# EAGLE board SparkFun_Pulse_Oximeter_Heart-Rate_Sensor-Panel (EAGLE 9.6.2), part 1 of 4
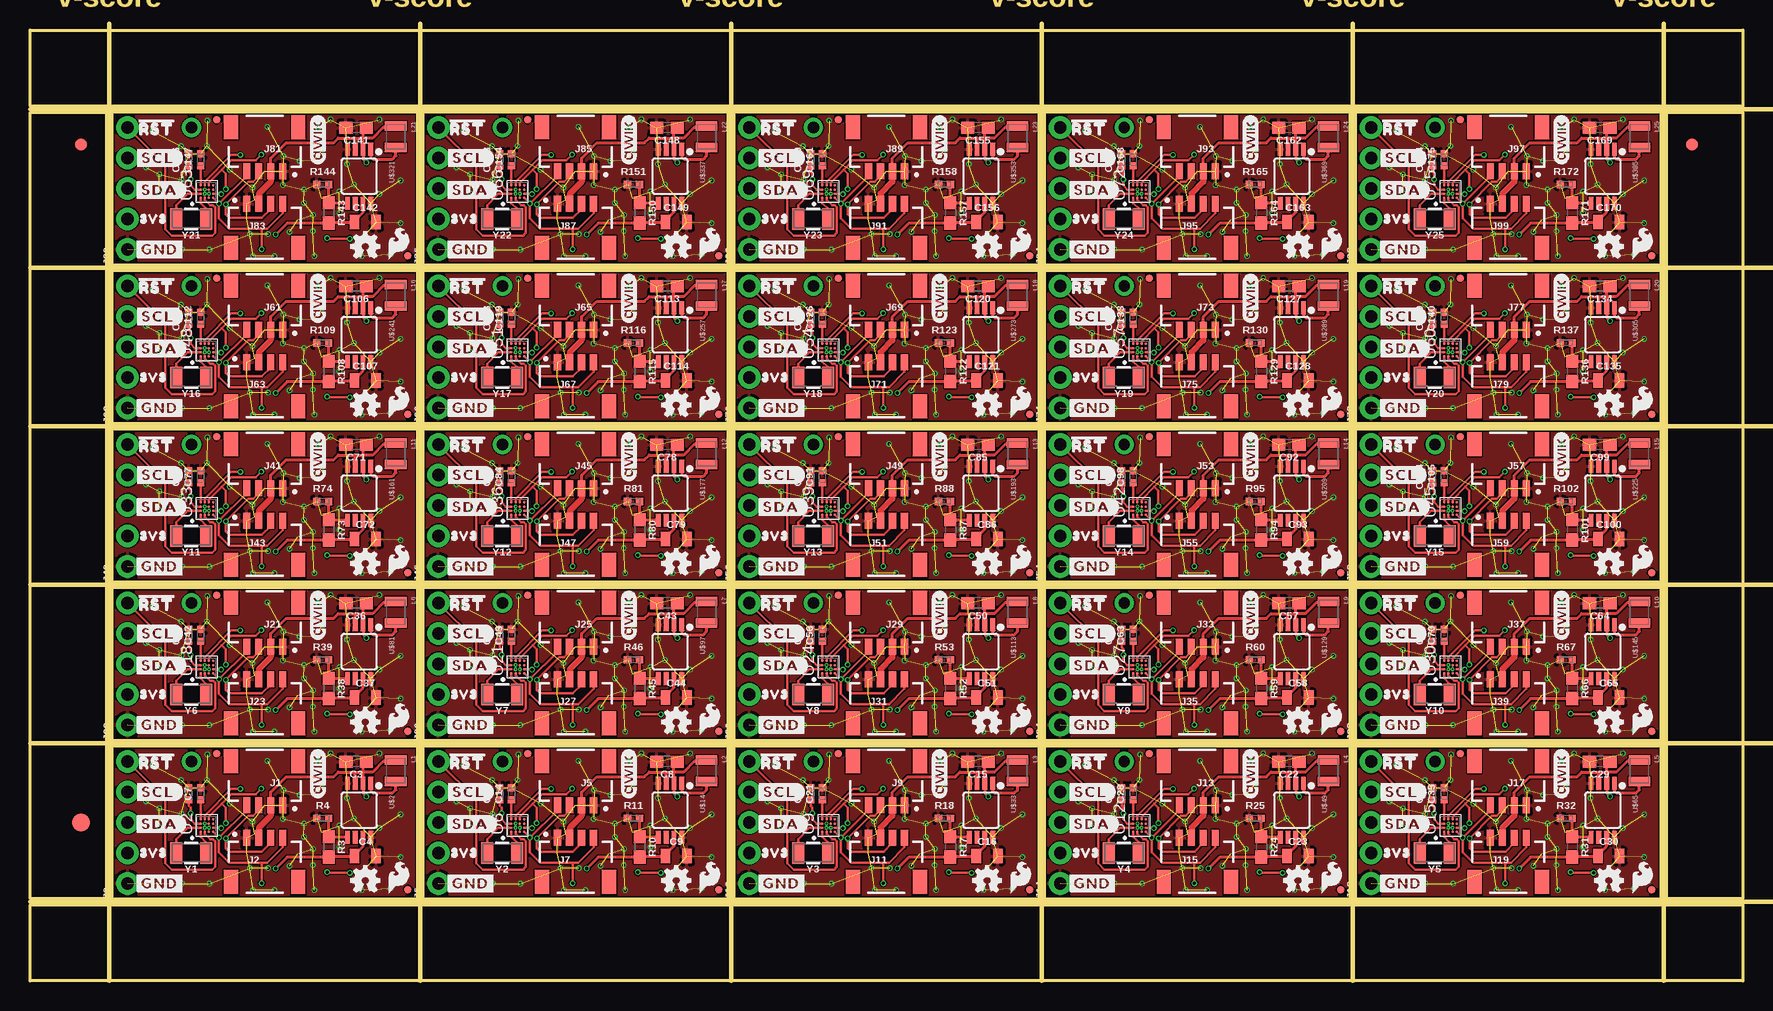
[diagram p0: board, top side]
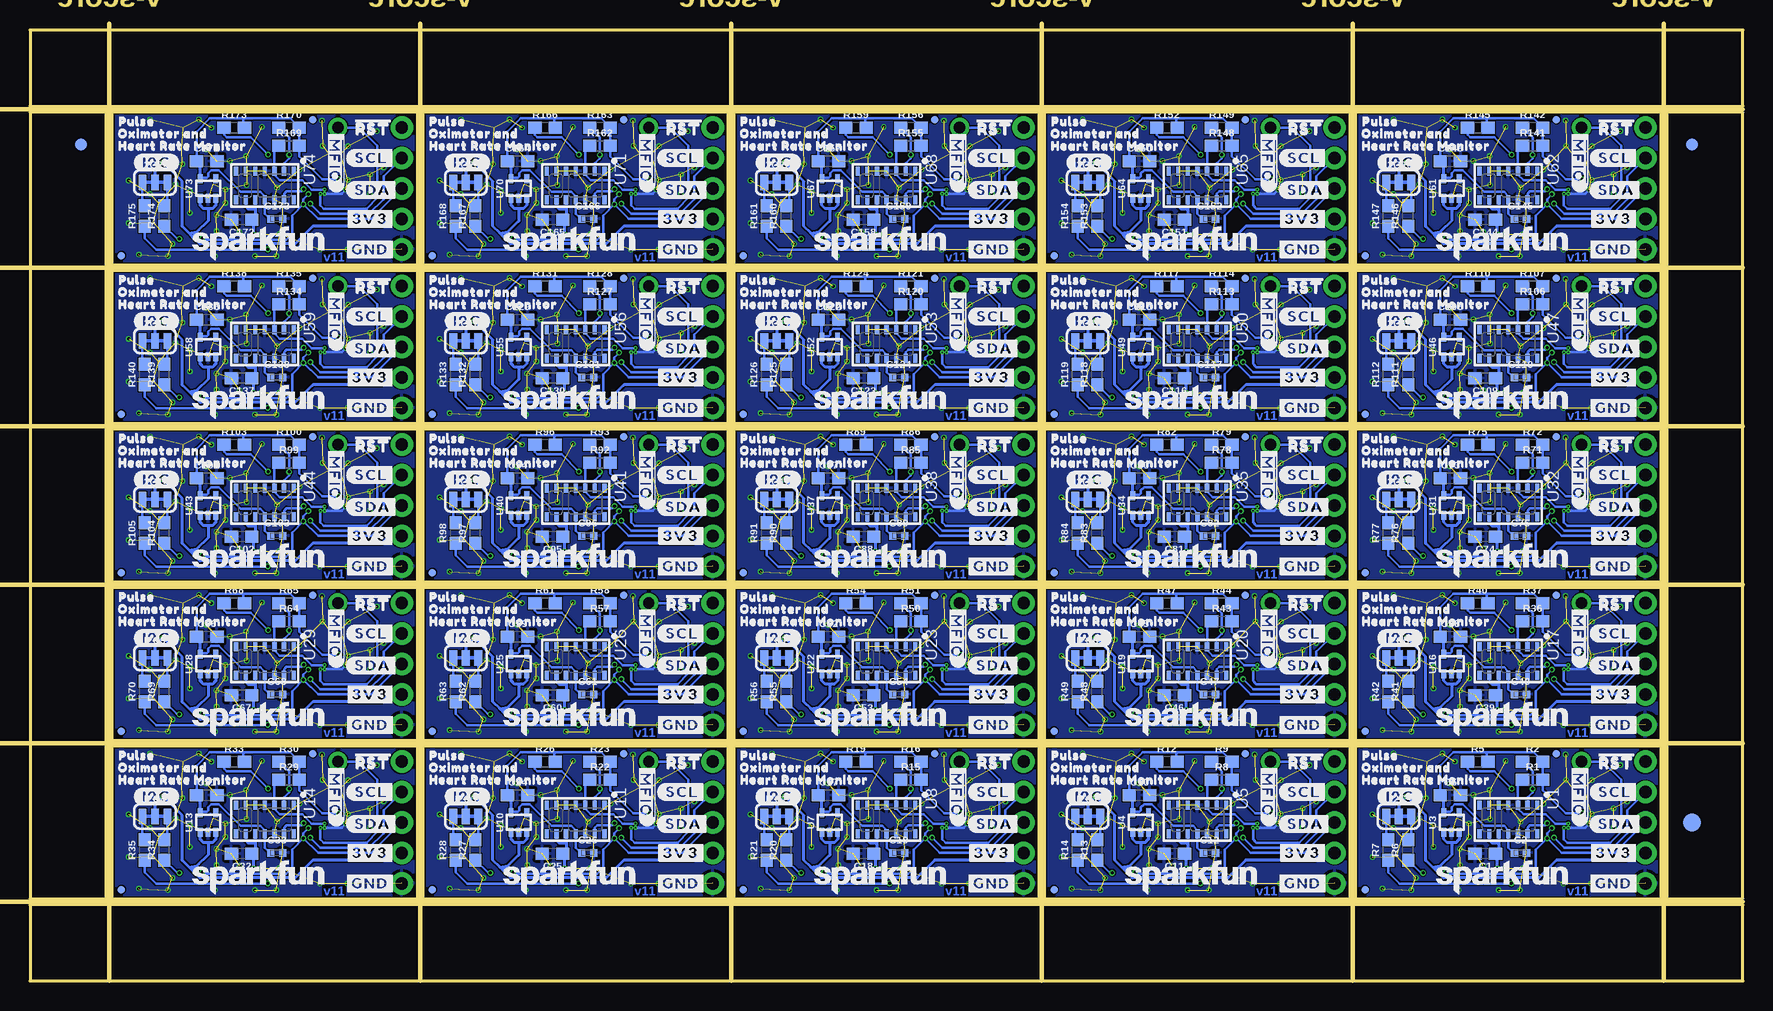
[diagram p1: board, bottom side, seen from below]

Size 142.75 x 79.25 mm. Coordinates in mm from the lower left corner, seen from the top.
Outline: 6.86,6.86 6.86,19.56 32.26,19.56 32.26,6.86 6.86,6.86
Outline: 32.77,6.86 32.77,19.56 58.17,19.56 58.17,6.86 32.77,6.86
Outline: 58.67,6.86 58.67,19.56 84.07,19.56 84.07,6.86 58.67,6.86
Outline: 84.58,6.86 84.58,19.56 109.98,19.56 109.98,6.86 84.58,6.86
Outline: 110.49,6.86 110.49,19.56 135.89,19.56 135.89,6.86 110.49,6.86
Outline: 6.86,20.07 6.86,32.77 32.26,32.77 32.26,20.07 6.86,20.07
Outline: 32.77,20.07 32.77,32.77 58.17,32.77 58.17,20.07 32.77,20.07
Outline: 58.67,20.07 58.67,32.77 84.07,32.77 84.07,20.07 58.67,20.07
Outline: 84.58,20.07 84.58,32.77 109.98,32.77 109.98,20.07 84.58,20.07
Outline: 110.49,20.07 110.49,32.77 135.89,32.77 135.89,20.07 110.49,20.07
Outline: 6.86,33.27 6.86,45.97 32.26,45.97 32.26,33.27 6.86,33.27
Outline: 32.77,33.27 32.77,45.97 58.17,45.97 58.17,33.27 32.77,33.27
Outline: 58.67,33.27 58.67,45.97 84.07,45.97 84.07,33.27 58.67,33.27
Outline: 84.58,33.27 84.58,45.97 109.98,45.97 109.98,33.27 84.58,33.27
Outline: 110.49,33.27 110.49,45.97 135.89,45.97 135.89,33.27 110.49,33.27
Outline: 6.86,46.48 6.86,59.18 32.26,59.18 32.26,46.48 6.86,46.48
Outline: 32.77,46.48 32.77,59.18 58.17,59.18 58.17,46.48 32.77,46.48
Outline: 58.67,46.48 58.67,59.18 84.07,59.18 84.07,46.48 58.67,46.48
Outline: 84.58,46.48 84.58,59.18 109.98,59.18 109.98,46.48 84.58,46.48
Outline: 110.49,46.48 110.49,59.18 135.89,59.18 135.89,46.48 110.49,46.48
Outline: 6.86,59.69 6.86,72.39 32.26,72.39 32.26,59.69 6.86,59.69
Outline: 32.77,59.69 32.77,72.39 58.17,72.39 58.17,59.69 32.77,59.69
Outline: 58.67,59.69 58.67,72.39 84.07,72.39 84.07,59.69 58.67,59.69
Outline: 84.58,59.69 84.58,72.39 109.98,72.39 109.98,59.69 84.58,59.69
Outline: 110.49,59.69 110.49,72.39 135.89,72.39 135.89,59.69 110.49,59.69
Outline: 0,6.35 142.75,6.35 142.75,0 0,0 0,6.35
Outline: 136.4,72.39 142.75,72.39 142.75,6.86 136.4,6.86 136.4,72.39
Outline: 0,79.25 142.75,79.25 142.75,72.9 0,72.9 0,79.25
Outline: 0,72.39 6.35,72.39 6.35,6.86 0,6.86 0,72.39
Copper layers (1*16): Top 0.035mm / dielectric 1.5mm / Bottom 0.035mm
Design rules "SparkFun_Pulse_Oximeter_Heart-Rate_Sensor": minimum track width 4mil, minimum drill 4mil, track to track 4mil, track to pad 4mil, pad to pad 4mil, via to via 4mil, smd to smd 4mil, copper to edge 4mil, drill to drill 4mil, minimum pad ring 5mil, minimum via ring 4mil, stop-mask expansion 4mil, vias tented up to drill 25mil, thermal gap 10mil
Milling: 12 lines

## Footprints (pad centres in the part's own frame; a part is rotated, then mirrored left to right if it is on the bottom)
0603 = smd 1.1 x 1: 1 -0.85,0; 2 0.85,0
0402-TIGHT = smd 0.6 x 0.6: 1 -0.5,0; 2 0.5,0
0805 = smd 0.8 x 1.2: 1 -0.9,0; 2 0.9,0
FIDUCIAL-1X2 = smd 1 x 1: 1 0,0
FIDUCIAL-1.5X3 = smd 1.5 x 1.5: 1 0,0
FIDUCIAL-MICRO = smd 0.635 x 0.635: 1 0,0
SMT-JUMPER_3_2-NC_TRACE_SILK = smd 0.66 x 1.27: 1 -1.041,0; 2 0,0; 3 1.041,0
JST04_1MM_RA = smd 0.6 x 1.35: 1 -1.5,0; 2 -0.5,0; 3 0.5,0; 4 1.5,0 | smd 1.2 x 2: NC1 2.8,-3.675; NC2 -2.8,-3.675
1X05_NO_SILK = drill 1.016 pad 1.88: 1 0,0; 2 2.54,0; 3 5.08,0; 4 7.62,0; 5 10.16,0
1X01_NO_SILK = drill 0.95 pad 1.6: 1 0,0
0806 = smd 0.8 x 1.8: 1 -0.9,0; 2 0.9,0
14_PIN_OESIP = smd 0.75 x 0.35: P1 -1.193,2.409; P2 -1.193,1.609; P3 -1.193,0.809; P4 -1.193,0.009; P5 -1.193,-0.791; P6 -1.193,-1.591; P7 -1.193,-2.391; P8 1.207,-2.391; P9 1.207,-1.591; P10 1.207,-0.791; P11 1.207,0.009; P12 1.207,0.809; P13 1.207,1.609; P14 1.207,2.409
16_PIN_WLP = smd 0.2 x 0.2: 1 -0.532,0.518; 2 -0.182,0.518; 3 0.168,0.518; 4 0.518,0.518; 5 0.518,0.168; 6 0.518,-0.182; 7 0.518,-0.532; 8 0.168,-0.532; 9 -0.182,-0.532; 10 -0.532,-0.532; 11 -0.532,-0.182; 12 -0.532,0.168; 13 -0.182,0.168; 14 0.168,0.168; 15 0.168,-0.182; 16 -0.182,-0.182
SC70 = smd 0.4 x 0.75: 1 -0.65,-0.825; 2 0,-0.825; 3 0.65,-0.825; 4 0.65,0.825; 5 -0.65,0.825
MSOP8 = smd 0.4 x 1.1: 1 -0.975,-2.25; 2 -0.325,-2.25; 3 0.325,-2.25; 4 0.975,-2.25; 5 0.975,2.25; 6 0.325,2.25; 7 -0.325,2.25; 8 -0.975,2.25
CRYSTAL-SMD-3.2X1.5MM = smd 1 x 1.8: P$1 -1.25,0; P$2 1.25,0

## Placement (x,y rotation side)
C1  10uF  [0603]  21.48,10.62 180 bottom
C2  0.1uF  [0402-TIGHT]  18.54,10.67 0 bottom
C3  10uF  [0603]  27.18,18.29 180 top
C4  22uF  [0805]  27.94,10.41 0 top
C5  1.0uF  [0603]  24.38,15.49 0 bottom
C6  1.0uF  [0402-TIGHT]  13.24,15.6 90 top
C7  1.0uF  [0402-TIGHT]  14.22,15.6 90 top
C8  10uF  [0603]  53.09,18.29 180 top
C9  22uF  [0805]  53.85,10.41 0 top
C10  1.0uF  [0603]  50.29,15.49 0 bottom
C11  10uF  [0603]  47.39,10.62 180 bottom
C12  0.1uF  [0402-TIGHT]  44.45,10.67 0 bottom
C13  1.0uF  [0402-TIGHT]  39.15,15.6 90 top
C14  1.0uF  [0402-TIGHT]  40.13,15.6 90 top
C15  10uF  [0603]  78.99,18.29 180 top
C16  22uF  [0805]  79.76,10.41 0 top
C17  1.0uF  [0603]  76.2,15.49 0 bottom
C18  10uF  [0603]  73.3,10.62 180 bottom
C19  0.1uF  [0402-TIGHT]  70.36,10.67 0 bottom
C20  1.0uF  [0402-TIGHT]  65.05,15.6 90 top
C21  1.0uF  [0402-TIGHT]  66.04,15.6 90 top
C22  10uF  [0603]  104.9,18.29 180 top
C23  22uF  [0805]  105.66,10.41 0 top
C24  1.0uF  [0603]  102.11,15.49 0 bottom
C25  10uF  [0603]  99.2,10.62 180 bottom
C26  0.1uF  [0402-TIGHT]  96.27,10.67 0 bottom
C27  1.0uF  [0402-TIGHT]  90.96,15.6 90 top
C28  1.0uF  [0402-TIGHT]  91.95,15.6 90 top
C29  10uF  [0603]  130.81,18.29 180 top
C30  22uF  [0805]  131.57,10.41 0 top
C31  1.0uF  [0603]  128.02,15.49 0 bottom
C32  10uF  [0603]  125.11,10.62 180 bottom
C33  0.1uF  [0402-TIGHT]  122.17,10.67 0 bottom
C34  1.0uF  [0402-TIGHT]  116.87,15.6 90 top
C35  1.0uF  [0402-TIGHT]  117.86,15.6 90 top
C36  10uF  [0603]  27.18,31.5 180 top
C37  22uF  [0805]  27.94,23.62 0 top
C38  1.0uF  [0603]  24.38,28.7 0 bottom
C39  10uF  [0603]  21.48,23.83 180 bottom
C40  0.1uF  [0402-TIGHT]  18.54,23.88 0 bottom
C41  1.0uF  [0402-TIGHT]  13.24,28.81 90 top
C42  1.0uF  [0402-TIGHT]  14.22,28.8 90 top
C43  10uF  [0603]  53.09,31.5 180 top
C44  22uF  [0805]  53.85,23.62 0 top
C45  1.0uF  [0603]  50.29,28.7 0 bottom
C46  10uF  [0603]  47.39,23.83 180 bottom
C47  0.1uF  [0402-TIGHT]  44.45,23.88 0 bottom
C48  1.0uF  [0402-TIGHT]  39.15,28.81 90 top
C49  1.0uF  [0402-TIGHT]  40.13,28.8 90 top
C50  10uF  [0603]  78.99,31.5 180 top
C51  22uF  [0805]  79.76,23.62 0 top
C52  1.0uF  [0603]  76.2,28.7 0 bottom
C53  10uF  [0603]  73.3,23.83 180 bottom
C54  0.1uF  [0402-TIGHT]  70.36,23.88 0 bottom
C55  1.0uF  [0402-TIGHT]  65.05,28.81 90 top
C56  1.0uF  [0402-TIGHT]  66.04,28.8 90 top
C57  10uF  [0603]  104.9,31.5 180 top
C58  22uF  [0805]  105.66,23.62 0 top
C59  1.0uF  [0603]  102.11,28.7 0 bottom
C60  10uF  [0603]  99.2,23.83 180 bottom
C61  0.1uF  [0402-TIGHT]  96.27,23.88 0 bottom
C62  1.0uF  [0402-TIGHT]  90.96,28.81 90 top
C63  1.0uF  [0402-TIGHT]  91.95,28.8 90 top
C64  10uF  [0603]  130.81,31.5 180 top
C65  22uF  [0805]  131.57,23.62 0 top
C66  1.0uF  [0603]  128.02,28.7 0 bottom
C67  10uF  [0603]  125.11,23.83 180 bottom
C68  0.1uF  [0402-TIGHT]  122.17,23.88 0 bottom
C69  1.0uF  [0402-TIGHT]  116.87,28.81 90 top
C70  1.0uF  [0402-TIGHT]  117.86,28.8 90 top
C71  10uF  [0603]  27.18,44.7 180 top
C72  22uF  [0805]  27.94,36.83 0 top
C73  1.0uF  [0603]  24.38,41.91 0 bottom
C74  10uF  [0603]  21.48,37.04 180 bottom
C75  0.1uF  [0402-TIGHT]  18.54,37.08 0 bottom
C76  1.0uF  [0402-TIGHT]  13.24,42.02 90 top
C77  1.0uF  [0402-TIGHT]  14.22,42.01 90 top
C78  10uF  [0603]  53.09,44.7 180 top
C79  22uF  [0805]  53.85,36.83 0 top
C80  1.0uF  [0603]  50.29,41.91 0 bottom
C81  10uF  [0603]  47.39,37.04 180 bottom
C82  0.1uF  [0402-TIGHT]  44.45,37.08 0 bottom
C83  1.0uF  [0402-TIGHT]  39.15,42.02 90 top
C84  1.0uF  [0402-TIGHT]  40.13,42.01 90 top
C85  10uF  [0603]  78.99,44.7 180 top
C86  22uF  [0805]  79.76,36.83 0 top
C87  1.0uF  [0603]  76.2,41.91 0 bottom
C88  10uF  [0603]  73.3,37.04 180 bottom
C89  0.1uF  [0402-TIGHT]  70.36,37.08 0 bottom
C90  1.0uF  [0402-TIGHT]  65.05,42.02 90 top
C91  1.0uF  [0402-TIGHT]  66.04,42.01 90 top
C92  10uF  [0603]  104.9,44.7 180 top
C93  22uF  [0805]  105.66,36.83 0 top
C94  1.0uF  [0603]  102.11,41.91 0 bottom
C95  10uF  [0603]  99.2,37.04 180 bottom
C96  0.1uF  [0402-TIGHT]  96.27,37.08 0 bottom
C97  1.0uF  [0402-TIGHT]  90.96,42.02 90 top
C98  1.0uF  [0402-TIGHT]  91.95,42.01 90 top
C99  10uF  [0603]  130.81,44.7 180 top
C100  22uF  [0805]  131.57,36.83 0 top
C101  1.0uF  [0603]  128.02,41.91 0 bottom
C102  10uF  [0603]  125.11,37.04 180 bottom
C103  0.1uF  [0402-TIGHT]  122.17,37.08 0 bottom
C104  1.0uF  [0402-TIGHT]  116.87,42.02 90 top
C105  1.0uF  [0402-TIGHT]  117.86,42.01 90 top
C106  10uF  [0603]  27.18,57.91 180 top
C107  22uF  [0805]  27.94,50.04 0 top
C108  1.0uF  [0603]  24.38,55.12 0 bottom
C109  10uF  [0603]  21.48,50.24 180 bottom
C110  0.1uF  [0402-TIGHT]  18.54,50.29 0 bottom
C111  1.0uF  [0402-TIGHT]  13.24,55.22 90 top
C112  1.0uF  [0402-TIGHT]  14.22,55.22 90 top
C113  10uF  [0603]  53.09,57.91 180 top
C114  22uF  [0805]  53.85,50.04 0 top
C115  1.0uF  [0603]  50.29,55.12 0 bottom
C116  10uF  [0603]  47.39,50.24 180 bottom
C117  0.1uF  [0402-TIGHT]  44.45,50.29 0 bottom
C118  1.0uF  [0402-TIGHT]  39.15,55.22 90 top
C119  1.0uF  [0402-TIGHT]  40.13,55.22 90 top
C120  10uF  [0603]  78.99,57.91 180 top
C121  22uF  [0805]  79.76,50.04 0 top
C122  1.0uF  [0603]  76.2,55.12 0 bottom
C123  10uF  [0603]  73.3,50.24 180 bottom
C124  0.1uF  [0402-TIGHT]  70.36,50.29 0 bottom
C125  1.0uF  [0402-TIGHT]  65.05,55.22 90 top
C126  1.0uF  [0402-TIGHT]  66.04,55.22 90 top
C127  10uF  [0603]  104.9,57.91 180 top
C128  22uF  [0805]  105.66,50.04 0 top
C129  1.0uF  [0603]  102.11,55.12 0 bottom
C130  10uF  [0603]  99.2,50.24 180 bottom
C131  0.1uF  [0402-TIGHT]  96.27,50.29 0 bottom
C132  1.0uF  [0402-TIGHT]  90.96,55.22 90 top
C133  1.0uF  [0402-TIGHT]  91.95,55.22 90 top
C134  10uF  [0603]  130.81,57.91 180 top
C135  22uF  [0805]  131.57,50.04 0 top
C136  1.0uF  [0603]  128.02,55.12 0 bottom
C137  10uF  [0603]  125.11,50.24 180 bottom
C138  0.1uF  [0402-TIGHT]  122.17,50.29 0 bottom
C139  1.0uF  [0402-TIGHT]  116.87,55.22 90 top
C140  1.0uF  [0402-TIGHT]  117.86,55.22 90 top
C141  10uF  [0603]  27.18,71.12 180 top
C142  22uF  [0805]  27.94,63.25 0 top
C143  1.0uF  [0603]  24.38,68.33 0 bottom
C144  10uF  [0603]  21.48,63.45 180 bottom
C145  0.1uF  [0402-TIGHT]  18.54,63.5 0 bottom
C146  1.0uF  [0402-TIGHT]  13.24,68.43 90 top
C147  1.0uF  [0402-TIGHT]  14.22,68.43 90 top
C148  10uF  [0603]  53.09,71.12 180 top
C149  22uF  [0805]  53.85,63.25 0 top
C150  1.0uF  [0603]  50.29,68.33 0 bottom
C151  10uF  [0603]  47.39,63.45 180 bottom
C152  0.1uF  [0402-TIGHT]  44.45,63.5 0 bottom
C153  1.0uF  [0402-TIGHT]  39.15,68.43 90 top
C154  1.0uF  [0402-TIGHT]  40.13,68.43 90 top
C155  10uF  [0603]  78.99,71.12 180 top
C156  22uF  [0805]  79.76,63.25 0 top
C157  1.0uF  [0603]  76.2,68.33 0 bottom
C158  10uF  [0603]  73.3,63.45 180 bottom
C159  0.1uF  [0402-TIGHT]  70.36,63.5 0 bottom
C160  1.0uF  [0402-TIGHT]  65.05,68.43 90 top
C161  1.0uF  [0402-TIGHT]  66.04,68.43 90 top
C162  10uF  [0603]  104.9,71.12 180 top
C163  22uF  [0805]  105.66,63.25 0 top
C164  1.0uF  [0603]  102.11,68.33 0 bottom
C165  10uF  [0603]  99.2,63.45 180 bottom
C166  0.1uF  [0402-TIGHT]  96.27,63.5 0 bottom
C167  1.0uF  [0402-TIGHT]  90.96,68.43 90 top
C168  1.0uF  [0402-TIGHT]  91.95,68.43 90 top
C169  10uF  [0603]  130.81,71.12 180 top
C170  22uF  [0805]  131.57,63.25 0 top
C171  1.0uF  [0603]  128.02,68.33 0 bottom
C172  10uF  [0603]  125.11,63.45 180 bottom
C173  0.1uF  [0402-TIGHT]  122.17,63.5 0 bottom
C174  1.0uF  [0402-TIGHT]  116.87,68.43 90 top
C175  1.0uF  [0402-TIGHT]  117.86,68.43 90 top
E$1  [FIDUCIAL-1X2]  4.23,69.72 0 top
E$2  [FIDUCIAL-1X2]  4.23,69.72 0 bottom
E$3  [FIDUCIAL-1X2]  138.51,69.72 0 top
E$4  [FIDUCIAL-1X2]  138.51,69.72 0 bottom
E$5  [FIDUCIAL-1.5X3]  4.23,13.21 0 top
E$6  [FIDUCIAL-1.5X3]  4.23,13.21 0 bottom
FD1  FIDUCIALUFIDUCIAL  [FIDUCIAL-MICRO]  15.55,18.94 0 bottom
FD2  FIDUCIALUFIDUCIAL  [FIDUCIAL-MICRO]  15.55,18.94 0 top
FD3  FIDUCIALUFIDUCIAL  [FIDUCIAL-MICRO]  31.5,7.62 0 bottom
FD4  FIDUCIALUFIDUCIAL  [FIDUCIAL-MICRO]  31.5,7.62 0 top
FD5  FIDUCIALUFIDUCIAL  [FIDUCIAL-MICRO]  41.46,18.94 0 bottom
FD6  FIDUCIALUFIDUCIAL  [FIDUCIAL-MICRO]  41.46,18.94 0 top
FD7  FIDUCIALUFIDUCIAL  [FIDUCIAL-MICRO]  57.4,7.62 0 bottom
FD8  FIDUCIALUFIDUCIAL  [FIDUCIAL-MICRO]  57.4,7.62 0 top
FD9  FIDUCIALUFIDUCIAL  [FIDUCIAL-MICRO]  67.37,18.94 0 bottom
FD10  FIDUCIALUFIDUCIAL  [FIDUCIAL-MICRO]  67.37,18.94 0 top
FD11  FIDUCIALUFIDUCIAL  [FIDUCIAL-MICRO]  83.31,7.62 0 bottom
FD12  FIDUCIALUFIDUCIAL  [FIDUCIAL-MICRO]  83.31,7.62 0 top
FD13  FIDUCIALUFIDUCIAL  [FIDUCIAL-MICRO]  93.27,18.94 0 bottom
FD14  FIDUCIALUFIDUCIAL  [FIDUCIAL-MICRO]  93.28,18.94 0 top
FD15  FIDUCIALUFIDUCIAL  [FIDUCIAL-MICRO]  109.22,7.62 0 bottom
FD16  FIDUCIALUFIDUCIAL  [FIDUCIAL-MICRO]  109.22,7.62 0 top
FD17  FIDUCIALUFIDUCIAL  [FIDUCIAL-MICRO]  119.18,18.94 0 bottom
FD18  FIDUCIALUFIDUCIAL  [FIDUCIAL-MICRO]  119.18,18.94 0 top
FD19  FIDUCIALUFIDUCIAL  [FIDUCIAL-MICRO]  135.13,7.62 0 bottom
FD20  FIDUCIALUFIDUCIAL  [FIDUCIAL-MICRO]  135.13,7.62 0 top
FD21  FIDUCIALUFIDUCIAL  [FIDUCIAL-MICRO]  15.55,32.15 0 bottom
FD22  FIDUCIALUFIDUCIAL  [FIDUCIAL-MICRO]  15.55,32.15 0 top
FD23  FIDUCIALUFIDUCIAL  [FIDUCIAL-MICRO]  31.5,20.83 0 bottom
FD24  FIDUCIALUFIDUCIAL  [FIDUCIAL-MICRO]  31.5,20.83 0 top
FD25  FIDUCIALUFIDUCIAL  [FIDUCIAL-MICRO]  41.46,32.15 0 bottom
FD26  FIDUCIALUFIDUCIAL  [FIDUCIAL-MICRO]  41.46,32.15 0 top
FD27  FIDUCIALUFIDUCIAL  [FIDUCIAL-MICRO]  57.4,20.83 0 bottom
FD28  FIDUCIALUFIDUCIAL  [FIDUCIAL-MICRO]  57.4,20.83 0 top
FD29  FIDUCIALUFIDUCIAL  [FIDUCIAL-MICRO]  67.37,32.15 0 bottom
FD30  FIDUCIALUFIDUCIAL  [FIDUCIAL-MICRO]  67.37,32.15 0 top
FD31  FIDUCIALUFIDUCIAL  [FIDUCIAL-MICRO]  83.31,20.83 0 bottom
FD32  FIDUCIALUFIDUCIAL  [FIDUCIAL-MICRO]  83.31,20.83 0 top
FD33  FIDUCIALUFIDUCIAL  [FIDUCIAL-MICRO]  93.27,32.15 0 bottom
FD34  FIDUCIALUFIDUCIAL  [FIDUCIAL-MICRO]  93.28,32.15 0 top
FD35  FIDUCIALUFIDUCIAL  [FIDUCIAL-MICRO]  109.22,20.83 0 bottom
FD36  FIDUCIALUFIDUCIAL  [FIDUCIAL-MICRO]  109.22,20.83 0 top
FD37  FIDUCIALUFIDUCIAL  [FIDUCIAL-MICRO]  119.18,32.15 0 bottom
FD38  FIDUCIALUFIDUCIAL  [FIDUCIAL-MICRO]  119.18,32.15 0 top
FD39  FIDUCIALUFIDUCIAL  [FIDUCIAL-MICRO]  135.13,20.83 0 bottom
FD40  FIDUCIALUFIDUCIAL  [FIDUCIAL-MICRO]  135.13,20.83 0 top
FD41  FIDUCIALUFIDUCIAL  [FIDUCIAL-MICRO]  15.55,45.36 0 bottom
FD42  FIDUCIALUFIDUCIAL  [FIDUCIAL-MICRO]  15.55,45.36 0 top
FD43  FIDUCIALUFIDUCIAL  [FIDUCIAL-MICRO]  31.5,34.04 0 bottom
FD44  FIDUCIALUFIDUCIAL  [FIDUCIAL-MICRO]  31.5,34.04 0 top
FD45  FIDUCIALUFIDUCIAL  [FIDUCIAL-MICRO]  41.46,45.36 0 bottom
FD46  FIDUCIALUFIDUCIAL  [FIDUCIAL-MICRO]  41.46,45.36 0 top
FD47  FIDUCIALUFIDUCIAL  [FIDUCIAL-MICRO]  57.4,34.04 0 bottom
FD48  FIDUCIALUFIDUCIAL  [FIDUCIAL-MICRO]  57.4,34.04 0 top
FD49  FIDUCIALUFIDUCIAL  [FIDUCIAL-MICRO]  67.37,45.36 0 bottom
FD50  FIDUCIALUFIDUCIAL  [FIDUCIAL-MICRO]  67.37,45.36 0 top
FD51  FIDUCIALUFIDUCIAL  [FIDUCIAL-MICRO]  83.31,34.04 0 bottom
FD52  FIDUCIALUFIDUCIAL  [FIDUCIAL-MICRO]  83.31,34.04 0 top
FD53  FIDUCIALUFIDUCIAL  [FIDUCIAL-MICRO]  93.27,45.36 0 bottom
FD54  FIDUCIALUFIDUCIAL  [FIDUCIAL-MICRO]  93.28,45.36 0 top
FD55  FIDUCIALUFIDUCIAL  [FIDUCIAL-MICRO]  109.22,34.04 0 bottom
FD56  FIDUCIALUFIDUCIAL  [FIDUCIAL-MICRO]  109.22,34.04 0 top
FD57  FIDUCIALUFIDUCIAL  [FIDUCIAL-MICRO]  119.18,45.36 0 bottom
FD58  FIDUCIALUFIDUCIAL  [FIDUCIAL-MICRO]  119.18,45.36 0 top
FD59  FIDUCIALUFIDUCIAL  [FIDUCIAL-MICRO]  135.13,34.04 0 bottom
FD60  FIDUCIALUFIDUCIAL  [FIDUCIAL-MICRO]  135.13,34.04 0 top
FD61  FIDUCIALUFIDUCIAL  [FIDUCIAL-MICRO]  15.55,58.56 0 bottom
FD62  FIDUCIALUFIDUCIAL  [FIDUCIAL-MICRO]  15.55,58.56 0 top
FD63  FIDUCIALUFIDUCIAL  [FIDUCIAL-MICRO]  31.5,47.24 0 bottom
FD64  FIDUCIALUFIDUCIAL  [FIDUCIAL-MICRO]  31.5,47.24 0 top
FD65  FIDUCIALUFIDUCIAL  [FIDUCIAL-MICRO]  41.46,58.56 0 bottom
FD66  FIDUCIALUFIDUCIAL  [FIDUCIAL-MICRO]  41.46,58.56 0 top
FD67  FIDUCIALUFIDUCIAL  [FIDUCIAL-MICRO]  57.4,47.24 0 bottom
FD68  FIDUCIALUFIDUCIAL  [FIDUCIAL-MICRO]  57.4,47.24 0 top
FD69  FIDUCIALUFIDUCIAL  [FIDUCIAL-MICRO]  67.37,58.56 0 bottom
FD70  FIDUCIALUFIDUCIAL  [FIDUCIAL-MICRO]  67.37,58.56 0 top
FD71  FIDUCIALUFIDUCIAL  [FIDUCIAL-MICRO]  83.31,47.24 0 bottom
FD72  FIDUCIALUFIDUCIAL  [FIDUCIAL-MICRO]  83.31,47.24 0 top
FD73  FIDUCIALUFIDUCIAL  [FIDUCIAL-MICRO]  93.27,58.56 0 bottom
FD74  FIDUCIALUFIDUCIAL  [FIDUCIAL-MICRO]  93.28,58.56 0 top
FD75  FIDUCIALUFIDUCIAL  [FIDUCIAL-MICRO]  109.22,47.24 0 bottom
FD76  FIDUCIALUFIDUCIAL  [FIDUCIAL-MICRO]  109.22,47.24 0 top
FD77  FIDUCIALUFIDUCIAL  [FIDUCIAL-MICRO]  119.18,58.56 0 bottom
FD78  FIDUCIALUFIDUCIAL  [FIDUCIAL-MICRO]  119.18,58.56 0 top
FD79  FIDUCIALUFIDUCIAL  [FIDUCIAL-MICRO]  135.13,47.24 0 bottom
FD80  FIDUCIALUFIDUCIAL  [FIDUCIAL-MICRO]  135.13,47.24 0 top
FD81  FIDUCIALUFIDUCIAL  [FIDUCIAL-MICRO]  15.55,71.77 0 bottom
FD82  FIDUCIALUFIDUCIAL  [FIDUCIAL-MICRO]  15.55,71.77 0 top
FD83  FIDUCIALUFIDUCIAL  [FIDUCIAL-MICRO]  31.5,60.45 0 bottom
FD84  FIDUCIALUFIDUCIAL  [FIDUCIAL-MICRO]  31.5,60.45 0 top
FD85  FIDUCIALUFIDUCIAL  [FIDUCIAL-MICRO]  41.46,71.77 0 bottom
FD86  FIDUCIALUFIDUCIAL  [FIDUCIAL-MICRO]  41.46,71.77 0 top
FD87  FIDUCIALUFIDUCIAL  [FIDUCIAL-MICRO]  57.4,60.45 0 bottom
FD88  FIDUCIALUFIDUCIAL  [FIDUCIAL-MICRO]  57.4,60.45 0 top
FD89  FIDUCIALUFIDUCIAL  [FIDUCIAL-MICRO]  67.37,71.77 0 bottom
FD90  FIDUCIALUFIDUCIAL  [FIDUCIAL-MICRO]  67.37,71.77 0 top
FD91  FIDUCIALUFIDUCIAL  [FIDUCIAL-MICRO]  83.31,60.45 0 bottom
FD92  FIDUCIALUFIDUCIAL  [FIDUCIAL-MICRO]  83.31,60.45 0 top
FD93  FIDUCIALUFIDUCIAL  [FIDUCIAL-MICRO]  93.27,71.77 0 bottom
FD94  FIDUCIALUFIDUCIAL  [FIDUCIAL-MICRO]  93.28,71.77 0 top
FD95  FIDUCIALUFIDUCIAL  [FIDUCIAL-MICRO]  109.22,60.45 0 bottom
FD96  FIDUCIALUFIDUCIAL  [FIDUCIAL-MICRO]  109.22,60.45 0 top
FD97  FIDUCIALUFIDUCIAL  [FIDUCIAL-MICRO]  119.18,71.77 0 bottom
FD98  FIDUCIALUFIDUCIAL  [FIDUCIAL-MICRO]  119.18,71.77 0 top
FD99  FIDUCIALUFIDUCIAL  [FIDUCIAL-MICRO]  135.13,60.45 0 bottom
FD100  FIDUCIALUFIDUCIAL  [FIDUCIAL-MICRO]  135.13,60.45 0 top
I2C  JUMPER-SMT_3_2-NC_TRACE_SILK  [SMT-JUMPER_3_2-NC_TRACE_SILK]  28.7,13.72 0 bottom
I2C1  JUMPER-SMT_3_2-NC_TRACE_SILK  [SMT-JUMPER_3_2-NC_TRACE_SILK]  54.61,13.72 0 bottom
I2C2  JUMPER-SMT_3_2-NC_TRACE_SILK  [SMT-JUMPER_3_2-NC_TRACE_SILK]  80.52,13.72 0 bottom
I2C3  JUMPER-SMT_3_2-NC_TRACE_SILK  [SMT-JUMPER_3_2-NC_TRACE_SILK]  106.43,13.72 0 bottom
I2C4  JUMPER-SMT_3_2-NC_TRACE_SILK  [SMT-JUMPER_3_2-NC_TRACE_SILK]  132.33,13.72 0 bottom
I2C5  JUMPER-SMT_3_2-NC_TRACE_SILK  [SMT-JUMPER_3_2-NC_TRACE_SILK]  28.7,26.92 0 bottom
I2C6  JUMPER-SMT_3_2-NC_TRACE_SILK  [SMT-JUMPER_3_2-NC_TRACE_SILK]  54.61,26.92 0 bottom
I2C7  JUMPER-SMT_3_2-NC_TRACE_SILK  [SMT-JUMPER_3_2-NC_TRACE_SILK]  80.52,26.92 0 bottom
I2C8  JUMPER-SMT_3_2-NC_TRACE_SILK  [SMT-JUMPER_3_2-NC_TRACE_SILK]  106.43,26.92 0 bottom
I2C9  JUMPER-SMT_3_2-NC_TRACE_SILK  [SMT-JUMPER_3_2-NC_TRACE_SILK]  132.33,26.92 0 bottom
I2C10  JUMPER-SMT_3_2-NC_TRACE_SILK  [SMT-JUMPER_3_2-NC_TRACE_SILK]  28.7,40.13 0 bottom
I2C11  JUMPER-SMT_3_2-NC_TRACE_SILK  [SMT-JUMPER_3_2-NC_TRACE_SILK]  54.61,40.13 0 bottom
I2C12  JUMPER-SMT_3_2-NC_TRACE_SILK  [SMT-JUMPER_3_2-NC_TRACE_SILK]  80.52,40.13 0 bottom
I2C13  JUMPER-SMT_3_2-NC_TRACE_SILK  [SMT-JUMPER_3_2-NC_TRACE_SILK]  106.43,40.13 0 bottom
I2C14  JUMPER-SMT_3_2-NC_TRACE_SILK  [SMT-JUMPER_3_2-NC_TRACE_SILK]  132.33,40.13 0 bottom
I2C15  JUMPER-SMT_3_2-NC_TRACE_SILK  [SMT-JUMPER_3_2-NC_TRACE_SILK]  28.7,53.34 0 bottom
I2C16  JUMPER-SMT_3_2-NC_TRACE_SILK  [SMT-JUMPER_3_2-NC_TRACE_SILK]  54.61,53.34 0 bottom
I2C17  JUMPER-SMT_3_2-NC_TRACE_SILK  [SMT-JUMPER_3_2-NC_TRACE_SILK]  80.52,53.34 0 bottom
I2C18  JUMPER-SMT_3_2-NC_TRACE_SILK  [SMT-JUMPER_3_2-NC_TRACE_SILK]  106.43,53.34 0 bottom
I2C19  JUMPER-SMT_3_2-NC_TRACE_SILK  [SMT-JUMPER_3_2-NC_TRACE_SILK]  132.33,53.34 0 bottom
I2C20  JUMPER-SMT_3_2-NC_TRACE_SILK  [SMT-JUMPER_3_2-NC_TRACE_SILK]  28.7,66.55 0 bottom
I2C21  JUMPER-SMT_3_2-NC_TRACE_SILK  [SMT-JUMPER_3_2-NC_TRACE_SILK]  54.61,66.55 0 bottom
I2C22  JUMPER-SMT_3_2-NC_TRACE_SILK  [SMT-JUMPER_3_2-NC_TRACE_SILK]  80.52,66.55 0 bottom
I2C23  JUMPER-SMT_3_2-NC_TRACE_SILK  [SMT-JUMPER_3_2-NC_TRACE_SILK]  106.43,66.55 0 bottom
I2C24  JUMPER-SMT_3_2-NC_TRACE_SILK  [SMT-JUMPER_3_2-NC_TRACE_SILK]  132.33,66.55 0 bottom
J1  QWIIC_RIGHT_ANGLE  [JST04_1MM_RA]  19.56,14.66 180 top
J2  QWIIC_RIGHT_ANGLE  [JST04_1MM_RA]  19.56,11.94 0 top
J3  [1X05_NO_SILK]  8.13,8.13 90 top
J4  [1X01_NO_SILK]  13.46,18.29 0 top
J5  QWIIC_RIGHT_ANGLE  [JST04_1MM_RA]  45.47,14.66 180 top
J6  [1X05_NO_SILK]  34.04,8.13 90 top
J7  QWIIC_RIGHT_ANGLE  [JST04_1MM_RA]  45.47,11.94 0 top
J8  [1X01_NO_SILK]  39.37,18.29 0 top
J9  QWIIC_RIGHT_ANGLE  [JST04_1MM_RA]  71.37,14.66 180 top
J10  [1X05_NO_SILK]  59.94,8.13 90 top
J11  QWIIC_RIGHT_ANGLE  [JST04_1MM_RA]  71.37,11.94 0 top
J12  [1X01_NO_SILK]  65.28,18.29 0 top
J13  QWIIC_RIGHT_ANGLE  [JST04_1MM_RA]  97.28,14.66 180 top
J14  [1X05_NO_SILK]  85.85,8.13 90 top
J15  QWIIC_RIGHT_ANGLE  [JST04_1MM_RA]  97.28,11.94 0 top
J16  [1X01_NO_SILK]  91.19,18.29 0 top
J17  QWIIC_RIGHT_ANGLE  [JST04_1MM_RA]  123.19,14.66 180 top
J18  [1X05_NO_SILK]  111.76,8.13 90 top
J19  QWIIC_RIGHT_ANGLE  [JST04_1MM_RA]  123.19,11.94 0 top
J20  [1X01_NO_SILK]  117.09,18.29 0 top
J21  QWIIC_RIGHT_ANGLE  [JST04_1MM_RA]  19.56,27.86 180 top
J22  [1X05_NO_SILK]  8.13,21.34 90 top
J23  QWIIC_RIGHT_ANGLE  [JST04_1MM_RA]  19.56,25.15 0 top
J24  [1X01_NO_SILK]  13.46,31.5 0 top
J25  QWIIC_RIGHT_ANGLE  [JST04_1MM_RA]  45.47,27.86 180 top
J26  [1X05_NO_SILK]  34.04,21.34 90 top
J27  QWIIC_RIGHT_ANGLE  [JST04_1MM_RA]  45.47,25.15 0 top
J28  [1X01_NO_SILK]  39.37,31.5 0 top
J29  QWIIC_RIGHT_ANGLE  [JST04_1MM_RA]  71.37,27.86 180 top
J30  [1X05_NO_SILK]  59.94,21.34 90 top
J31  QWIIC_RIGHT_ANGLE  [JST04_1MM_RA]  71.37,25.15 0 top
J32  [1X01_NO_SILK]  65.28,31.5 0 top
J33  QWIIC_RIGHT_ANGLE  [JST04_1MM_RA]  97.28,27.86 180 top
J34  [1X05_NO_SILK]  85.85,21.34 90 top
J35  QWIIC_RIGHT_ANGLE  [JST04_1MM_RA]  97.28,25.15 0 top
J36  [1X01_NO_SILK]  91.19,31.5 0 top
J37  QWIIC_RIGHT_ANGLE  [JST04_1MM_RA]  123.19,27.86 180 top
J38  [1X05_NO_SILK]  111.76,21.34 90 top
J39  QWIIC_RIGHT_ANGLE  [JST04_1MM_RA]  123.19,25.15 0 top
J40  [1X01_NO_SILK]  117.09,31.5 0 top
J41  QWIIC_RIGHT_ANGLE  [JST04_1MM_RA]  19.56,41.07 180 top
J42  [1X05_NO_SILK]  8.13,34.54 90 top
J43  QWIIC_RIGHT_ANGLE  [JST04_1MM_RA]  19.56,38.35 0 top
J44  [1X01_NO_SILK]  13.46,44.7 0 top
J45  QWIIC_RIGHT_ANGLE  [JST04_1MM_RA]  45.47,41.07 180 top
J46  [1X05_NO_SILK]  34.04,34.54 90 top
J47  QWIIC_RIGHT_ANGLE  [JST04_1MM_RA]  45.47,38.35 0 top
J48  [1X01_NO_SILK]  39.37,44.7 0 top
J49  QWIIC_RIGHT_ANGLE  [JST04_1MM_RA]  71.37,41.07 180 top
J50  [1X05_NO_SILK]  59.94,34.54 90 top
J51  QWIIC_RIGHT_ANGLE  [JST04_1MM_RA]  71.37,38.35 0 top
J52  [1X01_NO_SILK]  65.28,44.7 0 top
J53  QWIIC_RIGHT_ANGLE  [JST04_1MM_RA]  97.28,41.07 180 top
J54  [1X05_NO_SILK]  85.85,34.54 90 top
J55  QWIIC_RIGHT_ANGLE  [JST04_1MM_RA]  97.28,38.35 0 top
J56  [1X01_NO_SILK]  91.19,44.7 0 top
J57  QWIIC_RIGHT_ANGLE  [JST04_1MM_RA]  123.19,41.07 180 top
J58  [1X05_NO_SILK]  111.76,34.54 90 top
J59  QWIIC_RIGHT_ANGLE  [JST04_1MM_RA]  123.19,38.35 0 top
J60  [1X01_NO_SILK]  117.09,44.7 0 top
J61  QWIIC_RIGHT_ANGLE  [JST04_1MM_RA]  19.56,54.28 180 top
J62  [1X05_NO_SILK]  8.13,47.75 90 top
J63  QWIIC_RIGHT_ANGLE  [JST04_1MM_RA]  19.56,51.56 0 top
J64  [1X01_NO_SILK]  13.46,57.91 0 top
J65  QWIIC_RIGHT_ANGLE  [JST04_1MM_RA]  45.47,54.28 180 top
J66  [1X05_NO_SILK]  34.04,47.75 90 top
J67  QWIIC_RIGHT_ANGLE  [JST04_1MM_RA]  45.47,51.56 0 top
J68  [1X01_NO_SILK]  39.37,57.91 0 top
J69  QWIIC_RIGHT_ANGLE  [JST04_1MM_RA]  71.37,54.28 180 top
J70  [1X05_NO_SILK]  59.94,47.75 90 top
J71  QWIIC_RIGHT_ANGLE  [JST04_1MM_RA]  71.37,51.56 0 top
J72  [1X01_NO_SILK]  65.28,57.91 0 top
J73  QWIIC_RIGHT_ANGLE  [JST04_1MM_RA]  97.28,54.28 180 top
J74  [1X05_NO_SILK]  85.85,47.75 90 top
J75  QWIIC_RIGHT_ANGLE  [JST04_1MM_RA]  97.28,51.56 0 top
J76  [1X01_NO_SILK]  91.19,57.91 0 top
J77  QWIIC_RIGHT_ANGLE  [JST04_1MM_RA]  123.19,54.28 180 top
J78  [1X05_NO_SILK]  111.76,47.75 90 top
J79  QWIIC_RIGHT_ANGLE  [JST04_1MM_RA]  123.19,51.56 0 top
J80  [1X01_NO_SILK]  117.09,57.91 0 top
J81  QWIIC_RIGHT_ANGLE  [JST04_1MM_RA]  19.56,67.49 180 top
J82  [1X05_NO_SILK]  8.13,60.96 90 top
J83  QWIIC_RIGHT_ANGLE  [JST04_1MM_RA]  19.56,64.77 0 top
J84  [1X01_NO_SILK]  13.46,71.12 0 top
J85  QWIIC_RIGHT_ANGLE  [JST04_1MM_RA]  45.47,67.49 180 top
J86  [1X05_NO_SILK]  34.04,60.96 90 top
J87  QWIIC_RIGHT_ANGLE  [JST04_1MM_RA]  45.47,64.77 0 top
J88  [1X01_NO_SILK]  39.37,71.12 0 top
J89  QWIIC_RIGHT_ANGLE  [JST04_1MM_RA]  71.37,67.49 180 top
J90  [1X05_NO_SILK]  59.94,60.96 90 top
J91  QWIIC_RIGHT_ANGLE  [JST04_1MM_RA]  71.37,64.77 0 top
J92  [1X01_NO_SILK]  65.28,71.12 0 top
J93  QWIIC_RIGHT_ANGLE  [JST04_1MM_RA]  97.28,67.49 180 top
J94  [1X05_NO_SILK]  85.85,60.96 90 top
J95  QWIIC_RIGHT_ANGLE  [JST04_1MM_RA]  97.28,64.77 0 top
J96  [1X01_NO_SILK]  91.19,71.12 0 top
J97  QWIIC_RIGHT_ANGLE  [JST04_1MM_RA]  123.19,67.49 180 top
J98  [1X05_NO_SILK]  111.76,60.96 90 top
J99  QWIIC_RIGHT_ANGLE  [JST04_1MM_RA]  123.19,64.77 0 top
J100  [1X01_NO_SILK]  117.09,71.12 0 top
L1  2.2μH  [0806]  30.48,17.53 270 top
L2  2.2μH  [0806]  56.39,17.53 270 top
L3  2.2μH  [0806]  82.3,17.53 270 top
L4  2.2μH  [0806]  108.2,17.53 270 top
L5  2.2μH  [0806]  134.11,17.53 270 top
L6  2.2μH  [0806]  30.48,30.73 270 top
L7  2.2μH  [0806]  56.39,30.73 270 top
L8  2.2μH  [0806]  82.3,30.73 270 top
L9  2.2μH  [0806]  108.2,30.73 270 top
L10  2.2μH  [0806]  134.11,30.73 270 top
L11  2.2μH  [0806]  30.48,43.94 270 top
L12  2.2μH  [0806]  56.39,43.94 270 top
L13  2.2μH  [0806]  82.3,43.94 270 top
L14  2.2μH  [0806]  108.2,43.94 270 top
L15  2.2μH  [0806]  134.11,43.94 270 top
L16  2.2μH  [0806]  30.48,57.15 270 top
L17  2.2μH  [0806]  56.39,57.15 270 top
L18  2.2μH  [0806]  82.3,57.15 270 top
L19  2.2μH  [0806]  108.2,57.15 270 top
L20  2.2μH  [0806]  134.11,57.15 270 top
L21  2.2μH  [0806]  30.48,70.36 270 top
L22  2.2μH  [0806]  56.39,70.36 270 top
L23  2.2μH  [0806]  82.3,70.36 270 top
L24  2.2μH  [0806]  108.2,70.36 270 top
L25  2.2μH  [0806]  134.11,70.36 270 top
LOGO1  SFE_LOGO_FLAME.1_INCH  [SFE_LOGO_FLAME_.1]  30.73,8.64 0 top
LOGO2  OSHW-LOGOMINI  [OSHW-LOGO-MINI]  27.94,8.38 0 top
LOGO3  SFE_LOGO_NAME.1_INCH  [SFE_LOGO_NAME_.1]  20.07,8.64 0 bottom
LOGO4  SFE_LOGO_FLAME.1_INCH  [SFE_LOGO_FLAME_.1]  56.64,8.64 0 top
LOGO5  QWIIC_LOGO_4MM  [QWIIC_4MM]  24,17.27 90 top
LOGO6  OSHW-LOGOMINI  [OSHW-LOGO-MINI]  53.85,8.38 0 top
LOGO7  SFE_LOGO_NAME.1_INCH  [SFE_LOGO_NAME_.1]  45.97,8.64 0 bottom
LOGO8  QWIIC_LOGO_4MM  [QWIIC_4MM]  49.91,17.27 90 top
LOGO9  SFE_LOGO_FLAME.1_INCH  [SFE_LOGO_FLAME_.1]  82.55,8.64 0 top
LOGO10  OSHW-LOGOMINI  [OSHW-LOGO-MINI]  79.76,8.38 0 top
LOGO11  SFE_LOGO_NAME.1_INCH  [SFE_LOGO_NAME_.1]  71.88,8.64 0 bottom
LOGO12  QWIIC_LOGO_4MM  [QWIIC_4MM]  75.82,17.27 90 top
LOGO13  SFE_LOGO_FLAME.1_INCH  [SFE_LOGO_FLAME_.1]  108.46,8.64 0 top
LOGO14  OSHW-LOGOMINI  [OSHW-LOGO-MINI]  105.66,8.38 0 top
LOGO15  SFE_LOGO_NAME.1_INCH  [SFE_LOGO_NAME_.1]  97.79,8.64 0 bottom
LOGO16  QWIIC_LOGO_4MM  [QWIIC_4MM]  101.73,17.27 90 top
LOGO17  SFE_LOGO_FLAME.1_INCH  [SFE_LOGO_FLAME_.1]  134.37,8.64 0 top
LOGO18  OSHW-LOGOMINI  [OSHW-LOGO-MINI]  131.57,8.38 0 top
LOGO19  SFE_LOGO_NAME.1_INCH  [SFE_LOGO_NAME_.1]  123.7,8.64 0 bottom
LOGO20  QWIIC_LOGO_4MM  [QWIIC_4MM]  127.64,17.27 90 top
LOGO21  SFE_LOGO_FLAME.1_INCH  [SFE_LOGO_FLAME_.1]  30.73,21.84 0 top
LOGO22  OSHW-LOGOMINI  [OSHW-LOGO-MINI]  27.94,21.59 0 top
LOGO23  SFE_LOGO_NAME.1_INCH  [SFE_LOGO_NAME_.1]  20.07,21.84 0 bottom
LOGO24  QWIIC_LOGO_4MM  [QWIIC_4MM]  24,30.48 90 top
LOGO25  SFE_LOGO_FLAME.1_INCH  [SFE_LOGO_FLAME_.1]  56.64,21.84 0 top
LOGO26  OSHW-LOGOMINI  [OSHW-LOGO-MINI]  53.85,21.59 0 top
LOGO27  SFE_LOGO_NAME.1_INCH  [SFE_LOGO_NAME_.1]  45.97,21.84 0 bottom
LOGO28  QWIIC_LOGO_4MM  [QWIIC_4MM]  49.91,30.48 90 top
LOGO29  SFE_LOGO_FLAME.1_INCH  [SFE_LOGO_FLAME_.1]  82.55,21.84 0 top
LOGO30  OSHW-LOGOMINI  [OSHW-LOGO-MINI]  79.76,21.59 0 top
LOGO31  SFE_LOGO_NAME.1_INCH  [SFE_LOGO_NAME_.1]  71.88,21.84 0 bottom
LOGO32  QWIIC_LOGO_4MM  [QWIIC_4MM]  75.82,30.48 90 top
LOGO33  SFE_LOGO_FLAME.1_INCH  [SFE_LOGO_FLAME_.1]  108.46,21.84 0 top
LOGO34  OSHW-LOGOMINI  [OSHW-LOGO-MINI]  105.66,21.59 0 top
LOGO35  SFE_LOGO_NAME.1_INCH  [SFE_LOGO_NAME_.1]  97.79,21.84 0 bottom
LOGO36  QWIIC_LOGO_4MM  [QWIIC_4MM]  101.73,30.48 90 top
LOGO37  SFE_LOGO_FLAME.1_INCH  [SFE_LOGO_FLAME_.1]  134.37,21.84 0 top
LOGO38  OSHW-LOGOMINI  [OSHW-LOGO-MINI]  131.57,21.59 0 top
LOGO39  SFE_LOGO_NAME.1_INCH  [SFE_LOGO_NAME_.1]  123.7,21.84 0 bottom
LOGO40  QWIIC_LOGO_4MM  [QWIIC_4MM]  127.64,30.48 90 top
LOGO41  SFE_LOGO_FLAME.1_INCH  [SFE_LOGO_FLAME_.1]  30.73,35.05 0 top
LOGO42  OSHW-LOGOMINI  [OSHW-LOGO-MINI]  27.94,34.8 0 top
LOGO43  SFE_LOGO_NAME.1_INCH  [SFE_LOGO_NAME_.1]  20.07,35.05 0 bottom
LOGO44  QWIIC_LOGO_4MM  [QWIIC_4MM]  24,43.69 90 top
LOGO45  SFE_LOGO_FLAME.1_INCH  [SFE_LOGO_FLAME_.1]  56.64,35.05 0 top
LOGO46  OSHW-LOGOMINI  [OSHW-LOGO-MINI]  53.85,34.8 0 top
LOGO47  SFE_LOGO_NAME.1_INCH  [SFE_LOGO_NAME_.1]  45.97,35.05 0 bottom
LOGO48  QWIIC_LOGO_4MM  [QWIIC_4MM]  49.91,43.69 90 top
LOGO49  SFE_LOGO_FLAME.1_INCH  [SFE_LOGO_FLAME_.1]  82.55,35.05 0 top
LOGO50  OSHW-LOGOMINI  [OSHW-LOGO-MINI]  79.76,34.8 0 top
LOGO51  SFE_LOGO_NAME.1_INCH  [SFE_LOGO_NAME_.1]  71.88,35.05 0 bottom
LOGO52  QWIIC_LOGO_4MM  [QWIIC_4MM]  75.82,43.69 90 top
LOGO53  SFE_LOGO_FLAME.1_INCH  [SFE_LOGO_FLAME_.1]  108.46,35.05 0 top
LOGO54  OSHW-LOGOMINI  [OSHW-LOGO-MINI]  105.66,34.8 0 top
LOGO55  SFE_LOGO_NAME.1_INCH  [SFE_LOGO_NAME_.1]  97.79,35.05 0 bottom
LOGO56  QWIIC_LOGO_4MM  [QWIIC_4MM]  101.73,43.69 90 top
LOGO57  SFE_LOGO_FLAME.1_INCH  [SFE_LOGO_FLAME_.1]  134.37,35.05 0 top
LOGO58  OSHW-LOGOMINI  [OSHW-LOGO-MINI]  131.57,34.8 0 top
LOGO59  SFE_LOGO_NAME.1_INCH  [SFE_LOGO_NAME_.1]  123.7,35.05 0 bottom
LOGO60  QWIIC_LOGO_4MM  [QWIIC_4MM]  127.64,43.69 90 top
LOGO61  SFE_LOGO_FLAME.1_INCH  [SFE_LOGO_FLAME_.1]  30.73,48.26 0 top
LOGO62  OSHW-LOGOMINI  [OSHW-LOGO-MINI]  27.94,48.01 0 top
LOGO63  SFE_LOGO_NAME.1_INCH  [SFE_LOGO_NAME_.1]  20.07,48.26 0 bottom
LOGO64  QWIIC_LOGO_4MM  [QWIIC_4MM]  24,56.9 90 top
LOGO65  SFE_LOGO_FLAME.1_INCH  [SFE_LOGO_FLAME_.1]  56.64,48.26 0 top
LOGO66  OSHW-LOGOMINI  [OSHW-LOGO-MINI]  53.85,48.01 0 top
LOGO67  SFE_LOGO_NAME.1_INCH  [SFE_LOGO_NAME_.1]  45.97,48.26 0 bottom
LOGO68  QWIIC_LOGO_4MM  [QWIIC_4MM]  49.91,56.9 90 top
LOGO69  SFE_LOGO_FLAME.1_INCH  [SFE_LOGO_FLAME_.1]  82.55,48.26 0 top
LOGO70  OSHW-LOGOMINI  [OSHW-LOGO-MINI]  79.76,48.01 0 top
LOGO71  SFE_LOGO_NAME.1_INCH  [SFE_LOGO_NAME_.1]  71.88,48.26 0 bottom
LOGO72  QWIIC_LOGO_4MM  [QWIIC_4MM]  75.82,56.9 90 top
LOGO73  SFE_LOGO_FLAME.1_INCH  [SFE_LOGO_FLAME_.1]  108.46,48.26 0 top
LOGO74  OSHW-LOGOMINI  [OSHW-LOGO-MINI]  105.66,48.01 0 top
LOGO75  SFE_LOGO_NAME.1_INCH  [SFE_LOGO_NAME_.1]  97.79,48.26 0 bottom
LOGO76  QWIIC_LOGO_4MM  [QWIIC_4MM]  101.73,56.9 90 top
LOGO77  SFE_LOGO_FLAME.1_INCH  [SFE_LOGO_FLAME_.1]  134.37,48.26 0 top
LOGO78  OSHW-LOGOMINI  [OSHW-LOGO-MINI]  131.57,48.01 0 top
LOGO79  SFE_LOGO_NAME.1_INCH  [SFE_LOGO_NAME_.1]  123.7,48.26 0 bottom
LOGO80  QWIIC_LOGO_4MM  [QWIIC_4MM]  127.64,56.9 90 top
LOGO81  SFE_LOGO_FLAME.1_INCH  [SFE_LOGO_FLAME_.1]  30.73,61.47 0 top
LOGO82  OSHW-LOGOMINI  [OSHW-LOGO-MINI]  27.94,61.21 0 top
LOGO83  SFE_LOGO_NAME.1_INCH  [SFE_LOGO_NAME_.1]  20.07,61.47 0 bottom
LOGO84  QWIIC_LOGO_4MM  [QWIIC_4MM]  24,70.1 90 top
LOGO85  SFE_LOGO_FLAME.1_INCH  [SFE_LOGO_FLAME_.1]  56.64,61.47 0 top
LOGO86  OSHW-LOGOMINI  [OSHW-LOGO-MINI]  53.85,61.21 0 top
LOGO87  SFE_LOGO_NAME.1_INCH  [SFE_LOGO_NAME_.1]  45.97,61.47 0 bottom
LOGO88  QWIIC_LOGO_4MM  [QWIIC_4MM]  49.91,70.1 90 top
LOGO89  SFE_LOGO_FLAME.1_INCH  [SFE_LOGO_FLAME_.1]  82.55,61.47 0 top
LOGO90  OSHW-LOGOMINI  [OSHW-LOGO-MINI]  79.76,61.21 0 top
LOGO91  SFE_LOGO_NAME.1_INCH  [SFE_LOGO_NAME_.1]  71.88,61.47 0 bottom
LOGO92  QWIIC_LOGO_4MM  [QWIIC_4MM]  75.82,70.1 90 top
LOGO93  SFE_LOGO_FLAME.1_INCH  [SFE_LOGO_FLAME_.1]  108.46,61.47 0 top
LOGO94  OSHW-LOGOMINI  [OSHW-LOGO-MINI]  105.66,61.21 0 top
LOGO95  SFE_LOGO_NAME.1_INCH  [SFE_LOGO_NAME_.1]  97.79,61.47 0 bottom
LOGO96  QWIIC_LOGO_4MM  [QWIIC_4MM]  101.73,70.1 90 top
LOGO97  SFE_LOGO_FLAME.1_INCH  [SFE_LOGO_FLAME_.1]  134.37,61.47 0 top
LOGO98  OSHW-LOGOMINI  [OSHW-LOGO-MINI]  131.57,61.21 0 top
LOGO99  SFE_LOGO_NAME.1_INCH  [SFE_LOGO_NAME_.1]  123.7,61.47 0 bottom
LOGO100  QWIIC_LOGO_4MM  [QWIIC_4MM]  127.64,70.1 90 top
R1  4.7k  [0603]  17.53,16.76 0 bottom
R2  4.7k  [0603]  17.53,18.29 0 bottom
R3  750K  [0603]  24.89,11.18 270 top
R4  100k  [0402-TIGHT]  24.39,13.55 0 top
R5  4.7k  [0603]  22.1,18.29 0 bottom
R6  4.7k  [0603]  27.91,10.92 90 bottom
R7  4.7k  [0603]  29.54,10.92 90 bottom
R8  4.7k  [0603]  43.43,16.76 0 bottom
R9  4.7k  [0603]  43.43,18.29 0 bottom
R10  750K  [0603]  50.8,11.18 270 top
R11  100k  [0402-TIGHT]  50.3,13.55 0 top
R12  4.7k  [0603]  48.01,18.29 0 bottom
R13  4.7k  [0603]  53.82,10.92 90 bottom
R14  4.7k  [0603]  55.45,10.92 90 bottom
R15  4.7k  [0603]  69.34,16.76 0 bottom
R16  4.7k  [0603]  69.34,18.29 0 bottom
R17  750K  [0603]  76.71,11.18 270 top
R18  100k  [0402-TIGHT]  76.21,13.55 0 top
R19  4.7k  [0603]  73.91,18.29 0 bottom
R20  4.7k  [0603]  79.73,10.92 90 bottom
R21  4.7k  [0603]  81.36,10.92 90 bottom
R22  4.7k  [0603]  95.25,16.76 0 bottom
R23  4.7k  [0603]  95.25,18.29 0 bottom
R24  750K  [0603]  102.62,11.18 270 top
R25  100k  [0402-TIGHT]  102.11,13.55 0 top
R26  4.7k  [0603]  99.82,18.29 0 bottom
R27  4.7k  [0603]  105.64,10.92 90 bottom
R28  4.7k  [0603]  107.26,10.92 90 bottom
R29  4.7k  [0603]  121.16,16.76 0 bottom
R30  4.7k  [0603]  121.16,18.29 0 bottom
R31  750K  [0603]  128.52,11.18 270 top
R32  100k  [0402-TIGHT]  128.02,13.55 0 top
R33  4.7k  [0603]  125.73,18.29 0 bottom
R34  4.7k  [0603]  131.55,10.92 90 bottom
R35  4.7k  [0603]  133.17,10.92 90 bottom
R36  4.7k  [0603]  17.53,29.97 0 bottom
R37  4.7k  [0603]  17.53,31.5 0 bottom
R38  750K  [0603]  24.89,24.38 270 top
R39  100k  [0402-TIGHT]  24.39,26.76 0 top
R40  4.7k  [0603]  22.1,31.5 0 bottom
R41  4.7k  [0603]  27.91,24.13 90 bottom
R42  4.7k  [0603]  29.54,24.13 90 bottom
R43  4.7k  [0603]  43.43,29.97 0 bottom
R44  4.7k  [0603]  43.43,31.5 0 bottom
R45  750K  [0603]  50.8,24.38 270 top
R46  100k  [0402-TIGHT]  50.3,26.76 0 top
R47  4.7k  [0603]  48.01,31.5 0 bottom
R48  4.7k  [0603]  53.82,24.13 90 bottom
R49  4.7k  [0603]  55.45,24.13 90 bottom
R50  4.7k  [0603]  69.34,29.97 0 bottom
R51  4.7k  [0603]  69.34,31.5 0 bottom
R52  750K  [0603]  76.71,24.38 270 top
R53  100k  [0402-TIGHT]  76.21,26.76 0 top
R54  4.7k  [0603]  73.91,31.5 0 bottom
R55  4.7k  [0603]  79.73,24.13 90 bottom
R56  4.7k  [0603]  81.36,24.13 90 bottom
R57  4.7k  [0603]  95.25,29.97 0 bottom
R58  4.7k  [0603]  95.25,31.5 0 bottom
R59  750K  [0603]  102.62,24.38 270 top
R60  100k  [0402-TIGHT]  102.11,26.76 0 top
R61  4.7k  [0603]  99.82,31.5 0 bottom
R62  4.7k  [0603]  105.64,24.13 90 bottom
R63  4.7k  [0603]  107.26,24.13 90 bottom
R64  4.7k  [0603]  121.16,29.97 0 bottom
R65  4.7k  [0603]  121.16,31.5 0 bottom
R66  750K  [0603]  128.52,24.38 270 top
R67  100k  [0402-TIGHT]  128.02,26.76 0 top
R68  4.7k  [0603]  125.73,31.5 0 bottom
R69  4.7k  [0603]  131.55,24.13 90 bottom
R70  4.7k  [0603]  133.17,24.13 90 bottom
R71  4.7k  [0603]  17.53,43.18 0 bottom
R72  4.7k  [0603]  17.53,44.7 0 bottom
R73  750K  [0603]  24.89,37.59 270 top
R74  100k  [0402-TIGHT]  24.39,39.96 0 top
R75  4.7k  [0603]  22.1,44.7 0 bottom
R76  4.7k  [0603]  27.91,37.34 90 bottom
R77  4.7k  [0603]  29.54,37.34 90 bottom
R78  4.7k  [0603]  43.43,43.18 0 bottom
R79  4.7k  [0603]  43.43,44.7 0 bottom
R80  750K  [0603]  50.8,37.59 270 top
R81  100k  [0402-TIGHT]  50.3,39.96 0 top
R82  4.7k  [0603]  48.01,44.7 0 bottom
R83  4.7k  [0603]  53.82,37.34 90 bottom
R84  4.7k  [0603]  55.45,37.34 90 bottom
R85  4.7k  [0603]  69.34,43.18 0 bottom
R86  4.7k  [0603]  69.34,44.7 0 bottom
R87  750K  [0603]  76.71,37.59 270 top
R88  100k  [0402-TIGHT]  76.21,39.96 0 top
R89  4.7k  [0603]  73.91,44.7 0 bottom
R90  4.7k  [0603]  79.73,37.34 90 bottom
R91  4.7k  [0603]  81.36,37.34 90 bottom
R92  4.7k  [0603]  95.25,43.18 0 bottom
R93  4.7k  [0603]  95.25,44.7 0 bottom
R94  750K  [0603]  102.62,37.59 270 top
R95  100k  [0402-TIGHT]  102.11,39.96 0 top
R96  4.7k  [0603]  99.82,44.7 0 bottom
R97  4.7k  [0603]  105.64,37.34 90 bottom
R98  4.7k  [0603]  107.26,37.34 90 bottom
R99  4.7k  [0603]  121.16,43.18 0 bottom
R100  4.7k  [0603]  121.16,44.7 0 bottom
R101  750K  [0603]  128.52,37.59 270 top
R102  100k  [0402-TIGHT]  128.02,39.96 0 top
R103  4.7k  [0603]  125.73,44.7 0 bottom
R104  4.7k  [0603]  131.55,37.34 90 bottom
R105  4.7k  [0603]  133.17,37.34 90 bottom
R106  4.7k  [0603]  17.53,56.39 0 bottom
R107  4.7k  [0603]  17.53,57.91 0 bottom
R108  750K  [0603]  24.89,50.8 270 top
R109  100k  [0402-TIGHT]  24.39,53.17 0 top
R110  4.7k  [0603]  22.1,57.91 0 bottom
R111  4.7k  [0603]  27.91,50.55 90 bottom
R112  4.7k  [0603]  29.54,50.55 90 bottom
R113  4.7k  [0603]  43.43,56.39 0 bottom
R114  4.7k  [0603]  43.43,57.91 0 bottom
R115  750K  [0603]  50.8,50.8 270 top
R116  100k  [0402-TIGHT]  50.3,53.17 0 top
R117  4.7k  [0603]  48.01,57.91 0 bottom
R118  4.7k  [0603]  53.82,50.55 90 bottom
R119  4.7k  [0603]  55.45,50.55 90 bottom
R120  4.7k  [0603]  69.34,56.39 0 bottom
R121  4.7k  [0603]  69.34,57.91 0 bottom
R122  750K  [0603]  76.71,50.8 270 top
R123  100k  [0402-TIGHT]  76.21,53.17 0 top
R124  4.7k  [0603]  73.91,57.91 0 bottom
R125  4.7k  [0603]  79.73,50.55 90 bottom
R126  4.7k  [0603]  81.36,50.55 90 bottom
R127  4.7k  [0603]  95.25,56.39 0 bottom
R128  4.7k  [0603]  95.25,57.91 0 bottom
R129  750K  [0603]  102.62,50.8 270 top
R130  100k  [0402-TIGHT]  102.11,53.17 0 top
R131  4.7k  [0603]  99.82,57.91 0 bottom
R132  4.7k  [0603]  105.64,50.55 90 bottom
R133  4.7k  [0603]  107.26,50.55 90 bottom
R134  4.7k  [0603]  121.16,56.39 0 bottom
R135  4.7k  [0603]  121.16,57.91 0 bottom
R136  750K  [0603]  128.52,50.8 270 top
R137  100k  [0402-TIGHT]  128.02,53.17 0 top
R138  4.7k  [0603]  125.73,57.91 0 bottom
R139  4.7k  [0603]  131.55,50.55 90 bottom
R140  4.7k  [0603]  133.17,50.55 90 bottom
R141  4.7k  [0603]  17.53,69.6 0 bottom
R142  4.7k  [0603]  17.53,71.12 0 bottom
R143  750K  [0603]  24.89,64.01 270 top
R144  100k  [0402-TIGHT]  24.39,66.38 0 top
R145  4.7k  [0603]  22.1,71.12 0 bottom
R146  4.7k  [0603]  27.91,63.75 90 bottom
R147  4.7k  [0603]  29.54,63.75 90 bottom
R148  4.7k  [0603]  43.43,69.6 0 bottom
R149  4.7k  [0603]  43.43,71.12 0 bottom
R150  750K  [0603]  50.8,64.01 270 top
R151  100k  [0402-TIGHT]  50.3,66.38 0 top
R152  4.7k  [0603]  48.01,71.12 0 bottom
R153  4.7k  [0603]  53.82,63.75 90 bottom
R154  4.7k  [0603]  55.45,63.75 90 bottom
R155  4.7k  [0603]  69.34,69.6 0 bottom
R156  4.7k  [0603]  69.34,71.12 0 bottom
R157  750K  [0603]  76.71,64.01 270 top
R158  100k  [0402-TIGHT]  76.21,66.38 0 top
R159  4.7k  [0603]  73.91,71.12 0 bottom
R160  4.7k  [0603]  79.73,63.75 90 bottom
R161  4.7k  [0603]  81.36,63.75 90 bottom
R162  4.7k  [0603]  95.25,69.6 0 bottom
R163  4.7k  [0603]  95.25,71.12 0 bottom
R164  750K  [0603]  102.62,64.01 270 top
R165  100k  [0402-TIGHT]  102.11,66.38 0 top
R166  4.7k  [0603]  99.82,71.12 0 bottom
R167  4.7k  [0603]  105.64,63.75 90 bottom
R168  4.7k  [0603]  107.26,63.75 90 bottom
R169  4.7k  [0603]  121.16,69.6 0 bottom
R170  4.7k  [0603]  121.16,71.12 0 bottom
R171  750K  [0603]  128.52,64.01 270 top
R172  100k  [0402-TIGHT]  128.02,66.38 0 top
R173  4.7k  [0603]  125.73,71.12 0 bottom
R174  4.7k  [0603]  131.55,63.75 90 bottom
R175  4.7k  [0603]  133.17,63.75 90 bottom
U1  MAX30101EFD  [14_PIN_OESIP]  19.56,13.46 270 bottom
U2  MAX32664GWEA  [16_PIN_WLP]  14.73,12.95 90 top
U3  1.8V/100mA  [SC70]  24.28,13.21 0 bottom
U4  1.8V/100mA  [SC70]  50.19,13.21 0 bottom
U5  MAX30101EFD  [14_PIN_OESIP]  45.47,13.46 270 bottom
U6  MAX32664GWEA  [16_PIN_WLP]  40.64,12.95 90 top
U7  1.8V/100mA  [SC70]  76.1,13.21 0 bottom
U8  MAX30101EFD  [14_PIN_OESIP]  71.37,13.46 270 bottom
U9  MAX32664GWEA  [16_PIN_WLP]  66.55,12.95 90 top
U10  1.8V/100mA  [SC70]  102.01,13.21 0 bottom
U11  MAX30101EFD  [14_PIN_OESIP]  97.28,13.46 270 bottom
U12  MAX32664GWEA  [16_PIN_WLP]  92.46,12.95 90 top
U13  1.8V/100mA  [SC70]  127.91,13.21 0 bottom
U14  MAX30101EFD  [14_PIN_OESIP]  123.19,13.46 270 bottom
U15  MAX32664GWEA  [16_PIN_WLP]  118.36,12.95 90 top
U16  1.8V/100mA  [SC70]  24.28,26.42 0 bottom
U17  MAX30101EFD  [14_PIN_OESIP]  19.56,26.67 270 bottom
U18  MAX32664GWEA  [16_PIN_WLP]  14.73,26.16 90 top
U19  1.8V/100mA  [SC70]  50.19,26.42 0 bottom
U20  MAX30101EFD  [14_PIN_OESIP]  45.47,26.67 270 bottom
U21  MAX32664GWEA  [16_PIN_WLP]  40.64,26.16 90 top
U22  1.8V/100mA  [SC70]  76.1,26.42 0 bottom
U23  MAX30101EFD  [14_PIN_OESIP]  71.37,26.67 270 bottom
U24  MAX32664GWEA  [16_PIN_WLP]  66.55,26.16 90 top
U25  1.8V/100mA  [SC70]  102.01,26.42 0 bottom
U26  MAX30101EFD  [14_PIN_OESIP]  97.28,26.67 270 bottom
U27  MAX32664GWEA  [16_PIN_WLP]  92.46,26.16 90 top
U28  1.8V/100mA  [SC70]  127.91,26.42 0 bottom
U29  MAX30101EFD  [14_PIN_OESIP]  123.19,26.67 270 bottom
U30  MAX32664GWEA  [16_PIN_WLP]  118.36,26.16 90 top
U31  1.8V/100mA  [SC70]  24.28,39.62 0 bottom
U32  MAX30101EFD  [14_PIN_OESIP]  19.56,39.88 270 bottom
U33  MAX32664GWEA  [16_PIN_WLP]  14.73,39.37 90 top
U34  1.8V/100mA  [SC70]  50.19,39.62 0 bottom
U35  MAX30101EFD  [14_PIN_OESIP]  45.47,39.88 270 bottom
U36  MAX32664GWEA  [16_PIN_WLP]  40.64,39.37 90 top
U37  1.8V/100mA  [SC70]  76.1,39.62 0 bottom
U38  MAX30101EFD  [14_PIN_OESIP]  71.37,39.88 270 bottom
U39  MAX32664GWEA  [16_PIN_WLP]  66.55,39.37 90 top
U40  1.8V/100mA  [SC70]  102.01,39.62 0 bottom
U41  MAX30101EFD  [14_PIN_OESIP]  97.28,39.88 270 bottom
U42  MAX32664GWEA  [16_PIN_WLP]  92.46,39.37 90 top
U43  1.8V/100mA  [SC70]  127.91,39.62 0 bottom
U44  MAX30101EFD  [14_PIN_OESIP]  123.19,39.88 270 bottom
U45  MAX32664GWEA  [16_PIN_WLP]  118.36,39.37 90 top
U46  1.8V/100mA  [SC70]  24.28,52.83 0 bottom
U47  MAX30101EFD  [14_PIN_OESIP]  19.56,53.09 270 bottom
U48  MAX32664GWEA  [16_PIN_WLP]  14.73,52.58 90 top
U49  1.8V/100mA  [SC70]  50.19,52.83 0 bottom
U50  MAX30101EFD  [14_PIN_OESIP]  45.47,53.09 270 bottom
U51  MAX32664GWEA  [16_PIN_WLP]  40.64,52.58 90 top
U52  1.8V/100mA  [SC70]  76.1,52.83 0 bottom
U53  MAX30101EFD  [14_PIN_OESIP]  71.37,53.09 270 bottom
U54  MAX32664GWEA  [16_PIN_WLP]  66.55,52.58 90 top
U55  1.8V/100mA  [SC70]  102.01,52.83 0 bottom
U56  MAX30101EFD  [14_PIN_OESIP]  97.28,53.09 270 bottom
U57  MAX32664GWEA  [16_PIN_WLP]  92.46,52.58 90 top
U58  1.8V/100mA  [SC70]  127.91,52.83 0 bottom
U59  MAX30101EFD  [14_PIN_OESIP]  123.19,53.09 270 bottom
U60  MAX32664GWEA  [16_PIN_WLP]  118.36,52.58 90 top
U61  1.8V/100mA  [SC70]  24.28,66.04 0 bottom
U62  MAX30101EFD  [14_PIN_OESIP]  19.56,66.29 270 bottom
U63  MAX32664GWEA  [16_PIN_WLP]  14.73,65.79 90 top
U64  1.8V/100mA  [SC70]  50.19,66.04 0 bottom
U65  MAX30101EFD  [14_PIN_OESIP]  45.47,66.29 270 bottom
U66  MAX32664GWEA  [16_PIN_WLP]  40.64,65.79 90 top
U67  1.8V/100mA  [SC70]  76.1,66.04 0 bottom
U68  MAX30101EFD  [14_PIN_OESIP]  71.37,66.29 270 bottom
U69  MAX32664GWEA  [16_PIN_WLP]  66.55,65.79 90 top
U70  1.8V/100mA  [SC70]  102.01,66.04 0 bottom
U71  MAX30101EFD  [14_PIN_OESIP]  97.28,66.29 270 bottom
U72  MAX32664GWEA  [16_PIN_WLP]  92.46,65.79 90 top
U73  1.8V/100mA  [SC70]  127.91,66.04 0 bottom
U74  MAX30101EFD  [14_PIN_OESIP]  123.19,66.29 270 bottom
U75  MAX32664GWEA  [16_PIN_WLP]  118.36,65.79 90 top
U$1  [#I2C#1348]  28.57,15.37 0 bottom
U$2  PAM2401  [MSOP8]  27.43,14.22 180 top
U$3  [#GND#0]  10.79,8.13 0 top
U$4  [#SCL#7]  10.67,15.75 0 top
U$5  [#GND#0]  10.79,8.13 0 bottom
U$6  [#RST#32]  10.54,18.29 0 top
U$7  [3V338]  10.29,10.67 0 top
U$8  [#SDA#10]  10.79,13.08 0 top
U$9  [#3V3#1]  10.79,10.67 0 bottom
U$10  [#SDA#9]  10.54,13.08 0 bottom
U$11  [#SCL#9]  10.67,15.75 0 bottom
U$12  [#RST#32]  10.54,18.29 0 bottom
U$13  [##MFIO##12]  13.59,15.49 270 bottom
U$14  PAM2401  [MSOP8]  53.34,14.22 180 top
U$15  [#RST#32]  36.45,18.29 0 top
U$16  [#SCL#7]  36.58,15.75 0 top
U$17  [PULSE35]  30.23,18.8 0 bottom
U$18  [#SDA#10]  36.7,13.08 0 top
U$19  [#GND#0]  36.7,8.13 0 top
U$20  [OXIMETER_AND36]  28.07,17.78 0 bottom
U$21  [HEART_RATE_MONITOR37]  26.42,16.76 0 bottom
U$22  [#GND#0]  36.7,8.13 0 bottom
U$23  [#3V3#1]  36.7,10.67 0 bottom
U$24  [#SDA#9]  36.45,13.08 0 bottom
U$25  [#SCL#9]  36.58,15.75 0 bottom
U$26  [#RST#32]  36.45,18.29 0 bottom
U$27  [#I2C#1348]  54.48,15.37 0 bottom
U$28  [3V338]  36.2,10.67 0 top
U$29  [##MFIO##12]  39.5,15.49 270 bottom
U$30  [PULSE35]  56.13,18.8 0 bottom
U$31  [OXIMETER_AND36]  53.97,17.78 0 bottom
U$32  [HEART_RATE_MONITOR37]  52.32,16.76 0 bottom
U$33  PAM2401  [MSOP8]  79.25,14.22 180 top
U$34  [#RST#32]  62.36,18.29 0 top
U$35  [#SCL#7]  62.48,15.75 0 top
U$36  [#SDA#10]  62.61,13.08 0 top
U$37  [#GND#0]  62.61,8.13 0 top
U$38  [#GND#0]  62.61,8.13 0 bottom
U$39  [#3V3#1]  62.61,10.67 0 bottom
U$40  [#SDA#9]  62.36,13.08 0 bottom
U$41  [#SCL#9]  62.48,15.75 0 bottom
U$42  [#RST#32]  62.36,18.29 0 bottom
U$43  [#I2C#1348]  80.39,15.37 0 bottom
U$44  [3V338]  62.1,10.67 0 top
U$45  [##MFIO##12]  65.41,15.49 270 bottom
U$46  [PULSE35]  82.04,18.8 0 bottom
U$47  [OXIMETER_AND36]  79.88,17.78 0 bottom
U$48  [HEART_RATE_MONITOR37]  78.23,16.76 0 bottom
U$49  PAM2401  [MSOP8]  105.16,14.22 180 top
U$50  [#RST#32]  88.27,18.29 0 top
U$51  [#SCL#7]  88.39,15.75 0 top
U$52  [#SDA#10]  88.52,13.08 0 top
U$53  [#GND#0]  88.52,8.13 0 top
U$54  [#GND#0]  88.52,8.13 0 bottom
U$55  [#3V3#1]  88.52,10.67 0 bottom
U$56  [#SDA#9]  88.27,13.08 0 bottom
U$57  [#SCL#9]  88.39,15.75 0 bottom
U$58  [#RST#32]  88.27,18.29 0 bottom
U$59  [#I2C#1348]  106.3,15.37 0 bottom
U$60  [3V338]  88.01,10.67 0 top
U$61  [##MFIO##12]  91.31,15.49 270 bottom
U$62  [PULSE35]  107.95,18.8 0 bottom
U$63  [OXIMETER_AND36]  105.79,17.78 0 bottom
U$64  [HEART_RATE_MONITOR37]  104.14,16.76 0 bottom
U$65  PAM2401  [MSOP8]  131.06,14.22 180 top
U$66  [#RST#32]  114.17,18.29 0 top
U$67  [#SCL#7]  114.3,15.75 0 top
U$68  [#SDA#10]  114.43,13.08 0 top
U$69  [#GND#0]  114.43,8.13 0 top
U$70  [#GND#0]  114.43,8.13 0 bottom
U$71  [#3V3#1]  114.43,10.67 0 bottom
U$72  [#SDA#9]  114.17,13.08 0 bottom
U$73  [#SCL#9]  114.3,15.75 0 bottom
U$74  [#RST#32]  114.17,18.29 0 bottom
U$75  [#I2C#1348]  132.21,15.37 0 bottom
U$76  [3V338]  113.92,10.67 0 top
U$77  [##MFIO##12]  117.22,15.49 270 bottom
U$78  [PULSE35]  133.86,18.8 0 bottom
U$79  [OXIMETER_AND36]  131.7,17.78 0 bottom
U$80  [HEART_RATE_MONITOR37]  130.05,16.76 0 bottom
U$81  PAM2401  [MSOP8]  27.43,27.43 180 top
U$82  [#RST#32]  10.54,31.5 0 top
U$83  [#SCL#7]  10.67,28.96 0 top
U$84  [#SDA#10]  10.79,26.29 0 top
U$85  [#GND#0]  10.79,21.34 0 top
U$86  [#GND#0]  10.79,21.34 0 bottom
U$87  [#3V3#1]  10.79,23.88 0 bottom
U$88  [#SDA#9]  10.54,26.29 0 bottom
U$89  [#SCL#9]  10.67,28.96 0 bottom
U$90  [#RST#32]  10.54,31.5 0 bottom
U$91  [#I2C#1348]  28.57,28.57 0 bottom
U$92  [3V338]  10.29,23.88 0 top
U$93  [##MFIO##12]  13.59,28.7 270 bottom
U$94  [PULSE35]  30.23,32 0 bottom
U$95  [OXIMETER_AND36]  28.07,30.99 0 bottom
U$96  [HEART_RATE_MONITOR37]  26.42,29.97 0 bottom
U$97  PAM2401  [MSOP8]  53.34,27.43 180 top
U$98  [#RST#32]  36.45,31.5 0 top
U$99  [#SCL#7]  36.58,28.96 0 top
U$100  [#SDA#10]  36.7,26.29 0 top
U$101  [#GND#0]  36.7,21.34 0 top
U$102  [#GND#0]  36.7,21.34 0 bottom
U$103  [#3V3#1]  36.7,23.88 0 bottom
U$104  [#SDA#9]  36.45,26.29 0 bottom
U$105  [#SCL#9]  36.58,28.96 0 bottom
U$106  [#RST#32]  36.45,31.5 0 bottom
U$107  [#I2C#1348]  54.48,28.57 0 bottom
U$108  [3V338]  36.2,23.88 0 top
U$109  [##MFIO##12]  39.5,28.7 270 bottom
U$110  [PULSE35]  56.13,32 0 bottom
U$111  [OXIMETER_AND36]  53.97,30.99 0 bottom
U$112  [HEART_RATE_MONITOR37]  52.32,29.97 0 bottom
U$113  PAM2401  [MSOP8]  79.25,27.43 180 top
U$114  [#RST#32]  62.36,31.5 0 top
U$115  [#SCL#7]  62.48,28.96 0 top
U$116  [#SDA#10]  62.61,26.29 0 top
U$117  [#GND#0]  62.61,21.34 0 top
U$118  [#GND#0]  62.61,21.34 0 bottom
U$119  [#3V3#1]  62.61,23.88 0 bottom
U$120  [#SDA#9]  62.36,26.29 0 bottom
U$121  [#SCL#9]  62.48,28.96 0 bottom
U$122  [#RST#32]  62.36,31.5 0 bottom
U$123  [#I2C#1348]  80.39,28.57 0 bottom
U$124  [3V338]  62.1,23.88 0 top
U$125  [##MFIO##12]  65.41,28.7 270 bottom
U$126  [PULSE35]  82.04,32 0 bottom
U$127  [OXIMETER_AND36]  79.88,30.99 0 bottom
U$128  [HEART_RATE_MONITOR37]  78.23,29.97 0 bottom
U$129  PAM2401  [MSOP8]  105.16,27.43 180 top
U$130  [#RST#32]  88.27,31.5 0 top
U$131  [#SCL#7]  88.39,28.96 0 top
U$132  [#SDA#10]  88.52,26.29 0 top
U$133  [#GND#0]  88.52,21.34 0 top
U$134  [#GND#0]  88.52,21.34 0 bottom
U$135  [#3V3#1]  88.52,23.88 0 bottom
U$136  [#SDA#9]  88.27,26.29 0 bottom
U$137  [#SCL#9]  88.39,28.96 0 bottom
U$138  [#RST#32]  88.27,31.5 0 bottom
U$139  [#I2C#1348]  106.3,28.57 0 bottom
U$140  [3V338]  88.01,23.88 0 top
U$141  [##MFIO##12]  91.31,28.7 270 bottom
U$142  [PULSE35]  107.95,32 0 bottom
U$143  [OXIMETER_AND36]  105.79,30.99 0 bottom
U$144  [HEART_RATE_MONITOR37]  104.14,29.97 0 bottom
U$145  PAM2401  [MSOP8]  131.06,27.43 180 top
U$146  [#RST#32]  114.17,31.5 0 top
U$147  [#SCL#7]  114.3,28.96 0 top
U$148  [#SDA#10]  114.43,26.29 0 top
U$149  [#GND#0]  114.43,21.34 0 top
U$150  [#GND#0]  114.43,21.34 0 bottom
U$151  [#3V3#1]  114.43,23.88 0 bottom
U$152  [#SDA#9]  114.17,26.29 0 bottom
U$153  [#SCL#9]  114.3,28.96 0 bottom
U$154  [#RST#32]  114.17,31.5 0 bottom
U$155  [#I2C#1348]  132.21,28.57 0 bottom
U$156  [3V338]  113.92,23.88 0 top
U$157  [##MFIO##12]  117.22,28.7 270 bottom
U$158  [PULSE35]  133.86,32 0 bottom
U$159  [OXIMETER_AND36]  131.7,30.99 0 bottom
U$160  [HEART_RATE_MONITOR37]  130.05,29.97 0 bottom
U$161  PAM2401  [MSOP8]  27.43,40.64 180 top
U$162  [#RST#32]  10.54,44.7 0 top
U$163  [#SCL#7]  10.67,42.16 0 top
U$164  [#SDA#10]  10.79,39.5 0 top
U$165  [#GND#0]  10.79,34.54 0 top
U$166  [#GND#0]  10.79,34.54 0 bottom
U$167  [#3V3#1]  10.79,37.08 0 bottom
U$168  [#SDA#9]  10.54,39.5 0 bottom
U$169  [#SCL#9]  10.67,42.16 0 bottom
U$170  [#RST#32]  10.54,44.7 0 bottom
U$171  [#I2C#1348]  28.57,41.78 0 bottom
U$172  [3V338]  10.29,37.08 0 top
U$173  [##MFIO##12]  13.59,41.91 270 bottom
U$174  [PULSE35]  30.23,45.21 0 bottom
U$175  [OXIMETER_AND36]  28.07,44.2 0 bottom
U$176  [HEART_RATE_MONITOR37]  26.42,43.18 0 bottom
U$177  PAM2401  [MSOP8]  53.34,40.64 180 top
U$178  [#RST#32]  36.45,44.7 0 top
U$179  [#SCL#7]  36.58,42.16 0 top
U$180  [#SDA#10]  36.7,39.5 0 top
U$181  [#GND#0]  36.7,34.54 0 top
U$182  [#GND#0]  36.7,34.54 0 bottom
U$183  [#3V3#1]  36.7,37.08 0 bottom
U$184  [#SDA#9]  36.45,39.5 0 bottom
U$185  [#SCL#9]  36.58,42.16 0 bottom
U$186  [#RST#32]  36.45,44.7 0 bottom
U$187  [#I2C#1348]  54.48,41.78 0 bottom
U$188  [3V338]  36.2,37.08 0 top
U$189  [##MFIO##12]  39.5,41.91 270 bottom
U$190  [PULSE35]  56.13,45.21 0 bottom
U$191  [OXIMETER_AND36]  53.97,44.2 0 bottom
U$192  [HEART_RATE_MONITOR37]  52.32,43.18 0 bottom
U$193  PAM2401  [MSOP8]  79.25,40.64 180 top
U$194  [#RST#32]  62.36,44.7 0 top
U$195  [#SCL#7]  62.48,42.16 0 top
U$196  [#SDA#10]  62.61,39.5 0 top
U$197  [#GND#0]  62.61,34.54 0 top
U$198  [#GND#0]  62.61,34.54 0 bottom
U$199  [#3V3#1]  62.61,37.08 0 bottom
U$200  [#SDA#9]  62.36,39.5 0 bottom
U$201  [#SCL#9]  62.48,42.16 0 bottom
U$202  [#RST#32]  62.36,44.7 0 bottom
U$203  [#I2C#1348]  80.39,41.78 0 bottom
U$204  [3V338]  62.1,37.08 0 top